# EAGLE board 4-layer-microstrip-osh-v2 (EAGLE 9.4.1)
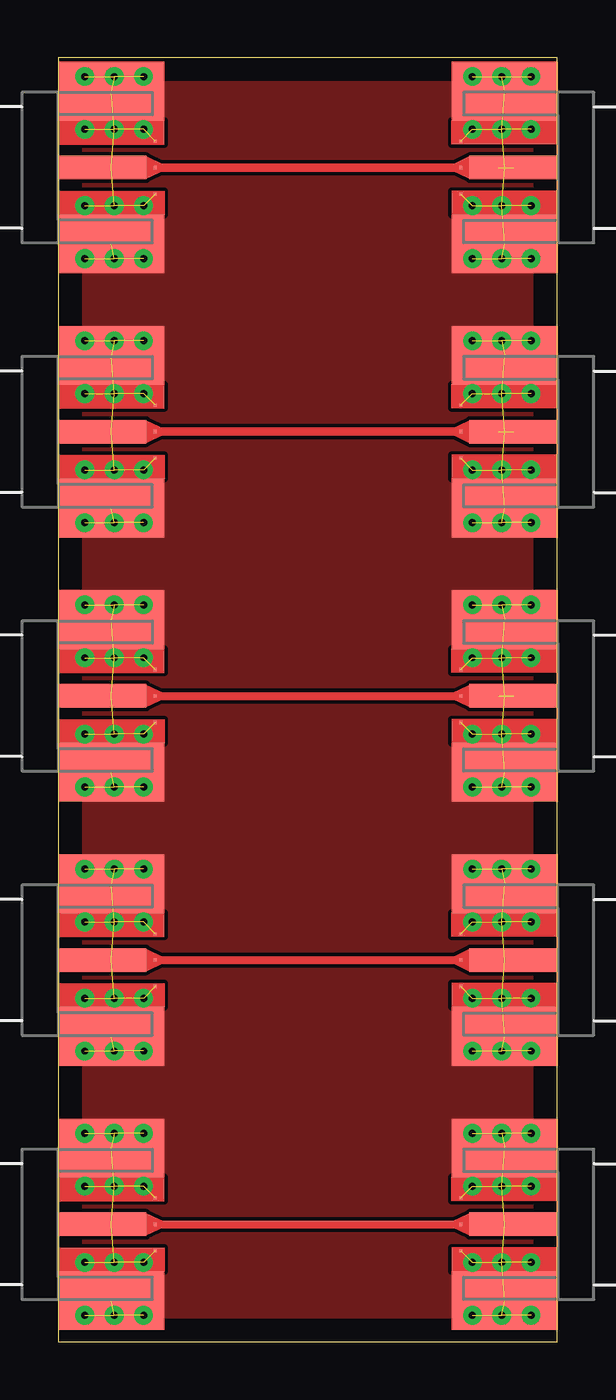
[diagram p0: board, top side]
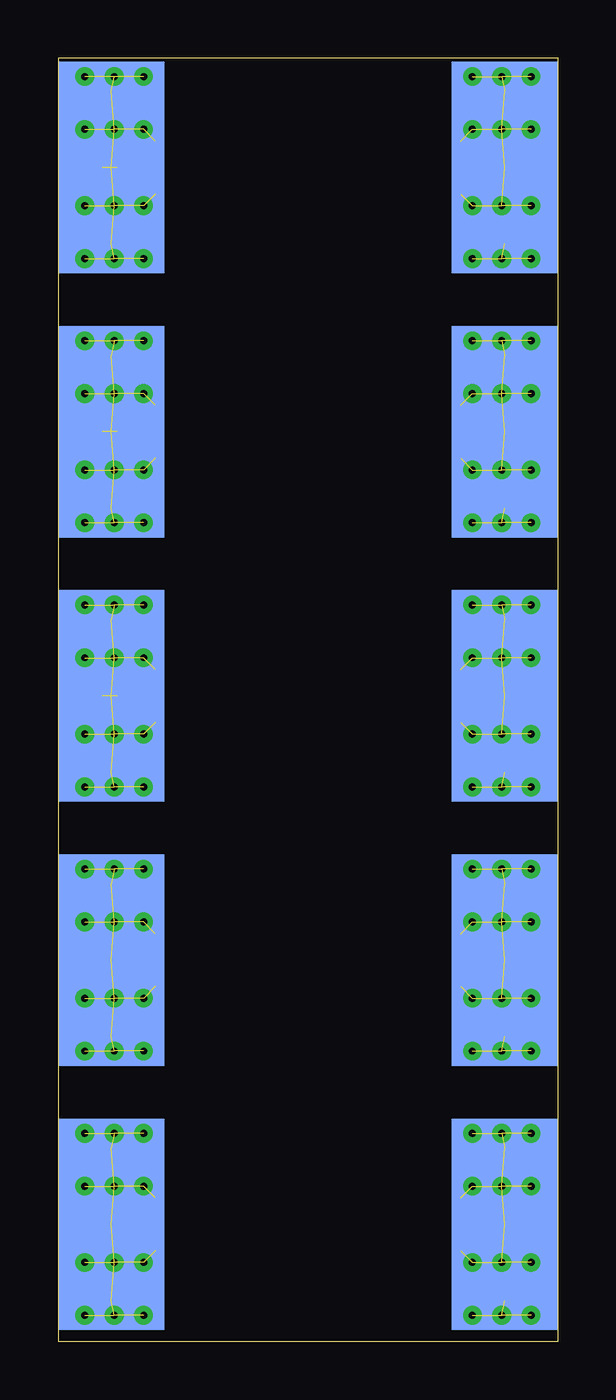
[diagram p1: board, bottom side, seen from below]

Size 21.57 x 55.55 mm. Coordinates in mm from the lower left corner, seen from the top.
Outline: 0,0 21.57,0 21.57,55.55 0,55.55 0,0
Copper layers (1*16): Top 0.035mm / dielectric 1.5mm / Bottom 0.035mm
Design rules "default": minimum track width 6mil, minimum drill 0.35mm, track to track 6mil, track to pad 6mil, pad to pad 6mil, via to via 6mil, smd to smd 6mil, copper to edge 40mil, drill to drill 6mil, minimum pad ring 10mil, minimum via ring 8mil, stop-mask expansion 4mil, vias tented up to drill 0mil, thermal gap 10mil
Net classes: 1 13-5: width 0.343 mm; 2 13-75: width 0.349 mm; 3 14-00: width 0.356 mm; 4 14-25: width 0.362 mm; 5 14-50: width 0.368 mm

## Footprints (pad centres in the part's own frame; a part is rotated, then mirrored left to right if it is on the bottom)
SMA_EDGE_LAUNCH_4L_4020_TAPER_FIXED = smd 4.572 x 9.144 bottom: BOTTOM_GND 2.286,0 | smd 3.81 x 1.016: CENTER@1 1.905,0 | drill 0.3: GND@1 1.143,3.937; GND@2 3.683,3.937; GND@3 1.143,1.651; GND@4 3.683,1.651; GND@5 1.143,-1.651; GND@6 3.683,-1.651; GND@7 1.143,-3.937; GND@8 3.683,-3.937; GND@14 2.413,3.937; GND@15 2.413,-3.937; GND@16 2.413,-1.651; GND@17 2.413,1.651 | smd 4.572 x 2.54: GND_PAD1 2.286,3.302; GND_PAD2 2.286,-3.302 | smd 0.127 x 0.127: P$1 4.191,1.143; P$2 4.191,-1.143; P$3 4.191,0

## Placement (x,y rotation side)
J1  [SMA_EDGE_LAUNCH_4L_4020_TAPER_FIXED]  21.59,5.08 180 top
J2  [SMA_EDGE_LAUNCH_4L_4020_TAPER_FIXED]  0,5.08 0 top
J3  [SMA_EDGE_LAUNCH_4L_4020_TAPER_FIXED]  0,16.51 0 top
J4  [SMA_EDGE_LAUNCH_4L_4020_TAPER_FIXED]  21.59,16.51 180 top
J5  [SMA_EDGE_LAUNCH_4L_4020_TAPER_FIXED]  0,27.94 0 top
J6  [SMA_EDGE_LAUNCH_4L_4020_TAPER_FIXED]  21.59,27.94 180 top
J7  [SMA_EDGE_LAUNCH_4L_4020_TAPER_FIXED]  0,39.37 0 top
J8  [SMA_EDGE_LAUNCH_4L_4020_TAPER_FIXED]  21.59,39.37 180 top
J9  [SMA_EDGE_LAUNCH_4L_4020_TAPER_FIXED]  0,50.8 0 top
J10  [SMA_EDGE_LAUNCH_4L_4020_TAPER_FIXED]  21.59,50.8 180 top

## Library data of the parts
J1-J10 = sma_footprint_2l

## Nets
GND: J1.BOTTOM_GND J1.GND@1 J1.GND@2 J1.GND@3 J1.GND@4 J1.GND@5 J1.GND@6 J1.GND@7 J1.GND@8 J1.GND@14 J1.GND@15 J1.GND@16 J1.GND@17 J1.GND_PAD1 J1.GND_PAD2 J1.P$1 J1.P$2 J2.BOTTOM_GND J2.GND@1 J2.GND@2 J2.GND@3 J2.GND@4 J2.GND@5 J2.GND@6 J2.GND@7 J2.GND@8 J2.GND@14 J2.GND@15 J2.GND@16 J2.GND@17 J2.GND_PAD1 J2.GND_PAD2 J2.P$1 J2.P$2 J3.BOTTOM_GND J3.GND@1 J3.GND@2 J3.GND@3 J3.GND@4 J3.GND@5 J3.GND@6 J3.GND@7 J3.GND@8 J3.GND@14 J3.GND@15 J3.GND@16 J3.GND@17 J3.GND_PAD1 J3.GND_PAD2 J3.P$1 J3.P$2 J4.BOTTOM_GND J4.GND@1 J4.GND@2 J4.GND@3 J4.GND@4 J4.GND@5 J4.GND@6 J4.GND@7 J4.GND@8 J4.GND@14 J4.GND@15 J4.GND@16 J4.GND@17 J4.GND_PAD1 J4.GND_PAD2 J4.P$1 J4.P$2 J5.BOTTOM_GND J5.GND@1 J5.GND@2 J5.GND@3 J5.GND@4 J5.GND@5 J5.GND@6 J5.GND@7 J5.GND@8 J5.GND@14 J5.GND@15 J5.GND@16 J5.GND@17 J5.GND_PAD1 J5.GND_PAD2 J5.P$1 J5.P$2 J6.BOTTOM_GND J6.GND@1 J6.GND@2 J6.GND@3 J6.GND@4 J6.GND@5 J6.GND@6 J6.GND@7 J6.GND@8 J6.GND@14 J6.GND@15 J6.GND@16 J6.GND@17 J6.GND_PAD1 J6.GND_PAD2 J6.P$1 J6.P$2 J7.BOTTOM_GND J7.GND@1 J7.GND@2 J7.GND@3 J7.GND@4 J7.GND@5 J7.GND@6 J7.GND@7 J7.GND@8 J7.GND@14 J7.GND@15 J7.GND@16 J7.GND@17 J7.GND_PAD1 J7.GND_PAD2 J7.P$1 J7.P$2 J8.BOTTOM_GND J8.GND@1 J8.GND@2 J8.GND@3 J8.GND@4 J8.GND@5 J8.GND@6 J8.GND@7 J8.GND@8 J8.GND@14 J8.GND@15 J8.GND@16 J8.GND@17 J8.GND_PAD1 J8.GND_PAD2 J8.P$1 J8.P$2 J9.BOTTOM_GND J9.GND@1 J9.GND@2 J9.GND@3 J9.GND@4 J9.GND@5 J9.GND@6 J9.GND@7 J9.GND@8 J9.GND@14 J9.GND@15 J9.GND@16 J9.GND@17 J9.GND_PAD1 J9.GND_PAD2 J9.P$1 J9.P$2 J10.BOTTOM_GND J10.GND@1 J10.GND@2 J10.GND@3 J10.GND@4 J10.GND@5 J10.GND@6 J10.GND@7 J10.GND@8 J10.GND@14 J10.GND@15 J10.GND@16 J10.GND@17 J10.GND_PAD1 J10.GND_PAD2 J10.P$1 J10.P$2
N$1 [13-5]: J1.CENTER@1 J1.P$3 J2.CENTER@1 J2.P$3
N$2 [13-75]: J3.CENTER@1 J3.P$3 J4.CENTER@1 J4.P$3
N$3 [14-00]: J5.CENTER@1 J5.P$3 J6.CENTER@1 J6.P$3
N$4 [14-25]: J7.CENTER@1 J7.P$3 J8.CENTER@1 J8.P$3
N$5 [14-50]: J9.CENTER@1 J9.P$3 J10.CENTER@1 J10.P$3

## Tracks (layer width: path | path; a pad name or v marks a point on that pad's centre or on a via)
GND  (155 unrouted)
  pour Top (no thermals): 0,0 21.59,0 21.59,55.88 0,55.88
N$1
  Top 0.343: J2.CENTER@1 J2.P$3 J1.P$3 17.78,5.08 J1.CENTER@1
N$2
  Top 0.349: J3.CENTER@1 J3.P$3 J4.P$3 J4.CENTER@1
N$3  (1 unrouted)
  Top 0.356: J6.P$3 J5.P$3 J5.CENTER@1 | 17.78,27.94 J6.P$3 | J6.P$3 19.05,27.94
N$4  (1 unrouted)
  Top 0.362: J7.CENTER@1 J7.P$3 J8.P$3 19.05,39.37
N$5  (1 unrouted)
  Top 0.368: J9.CENTER@1 J9.P$3 J10.P$3 19.05,50.8